# Altium PCB Current Sense.PcbDoc
Units mil, origin at the board's own origin, x right, y up, seen from the top; angles counter-clockwise.
Board outline 455 x 690 mil, 2 copper layers (Top Layer, Bottom Layer); 6 components, 4 nets, 20 pads, 2 vias.
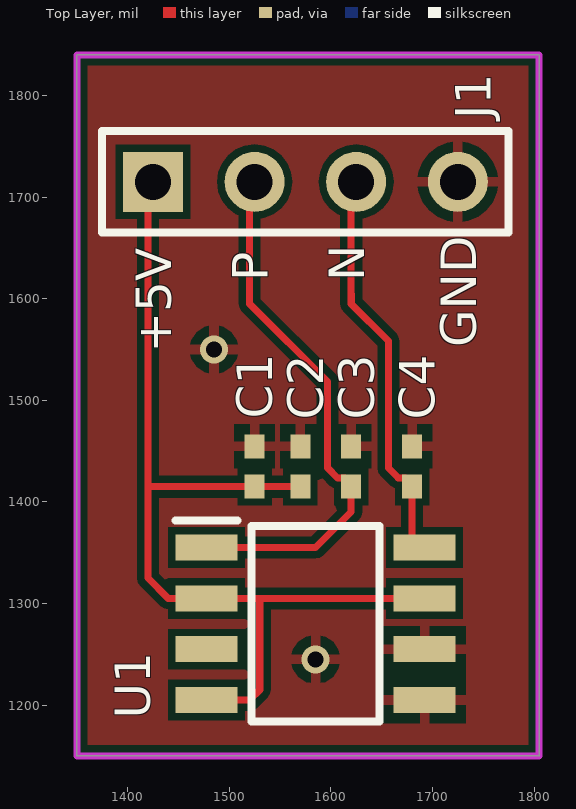
[diagram p0: Top Layer view]
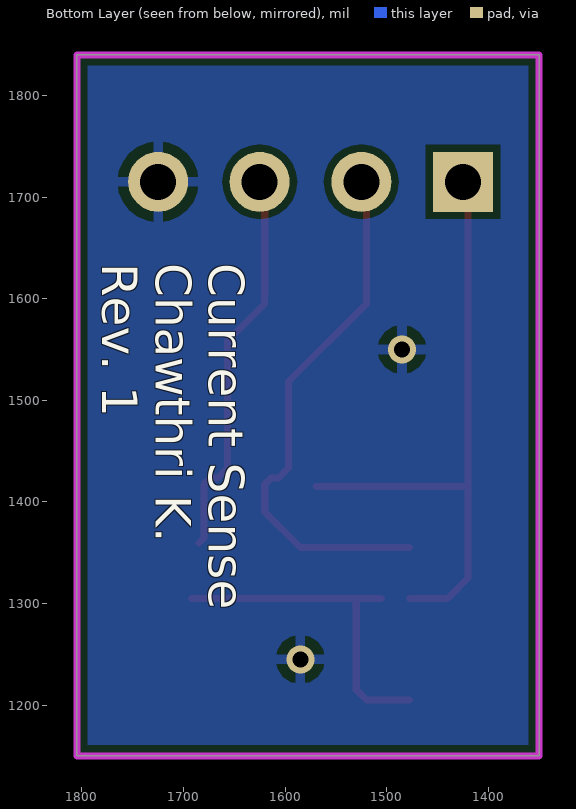
[diagram p1: Bottom Layer view, seen from below]

## Layer stack, top to bottom
Top Solder: solder mask 0.4, Solder Resist, Dk 3.5
Top Layer: signal copper 1.4
Dielectric 1: dielectric 12.6, FR-4, Dk 4.8
Bottom Layer: signal copper 1.4
Bottom Solder: solder mask 0.4, Solder Resist, Dk 3.5

## Board outline
1350,1150 1805,1150 1805,1840 1350,1840

## Design rules (kind name [scope] priority, off if disabled: settings)
Clearance [All] p1: gap=7 ignorepadtopadclearanceinfootprint=TRUE except(0: Arc-Hole Track-Hole SMDPad-Hole THPad-Hole Via-Hole Fill-Hole Poly-Hole Region-Hole Text-Hole)
DiffPairsRouting [All] p1: maxlimit=10 minlimit=7 mostfreqgap=7 toplayer_minwidth=7 toplayer_maxwidth=15 toplayer_prefwidth=7 bottomlayer_minwidth=7 bottomlayer_maxwidth=15 bottomlayer_prefwidth=7 maxuncoupledlength=500
MinimumSolderMaskSliver [All] p1: minsoldermaskwidth=7
PolygonConnect [All] p1: connectstyle=Relief reliefconductorwidth=10 reliefentries=4 polygonreliefangle="90 Angle" airgapwidth=10
RoutingVias [All] p1: holewidth=15.75 width=27.56 viastyle="Through Hole" minholewidth=15.75 minwidth=27.56 maxholewidth=28 maxwidth=50
SilkToSilkClearance [All] p1: silktosilkclearance=7
SilkToSolderMaskClearance [IsPad] p1: minsilkscreentomaskgap=7 clearancetoexposedcopper=TRUE
SolderMaskExpansion [All] p1: expansion=4 istentingtop=FALSE
Width [All] p1: maxlimit=15 minlimit=7 preferedwidth=7 minimp=50.000000 maximp=50.000000 favimp=50.000000
26 further rules are at their usual default settings.

## Classes and differential pairs
differential pair SENSE: +SENSE_P -SENSE_N

## Components (designator, comment, footprint, x,y, rotation, side; value= is the part's Value field where it differs from the comment)
C1 "Cap" 0402 1525,1435 r270 top value=100pF
C2 "Cap" 0402 1570,1435 r270 top value=100nF
C3 "Cap" 0402 1620,1435 r270 top value=1nF
C4 "Cap" 0402 1680,1435 r270 top value=1nF
J1 "Header 4H" HDR1X4 1425,1715 r0 top
U1 "MLX91205KDC-AAL-003-TU" SOIC127P602X173-8N 1585,1280 r0 top

## Footprints (in the part's own frame and the unit in brackets; to place one, negate y for a bottom-side part, rotate by r counter-clockwise, add the part's x,y. Pads: shape width x height; smd on the part's side, far side on the other; paste and mask are expansions set on the pad)
0402 [mm] "Chip Capacitor, Body 1.0x0.5mm, IPC High Density"
  rect 0.6x0.5 smd: 1(-0.5,0) 2(0.5,0)
  body extent -0.55,-0.3 0.55,0.3, height 1.3
HDR1X4 [mm] "Connector; Header; 4 Position"
  rect 1.5x1.5 hole 0.9: 1(0,0)
  round 1.5 hole 0.9: 2(2.54,0) 3(5.08,0) 4(7.62,0)
  silkscreen extent -1.27,-1.27 8.89,1.27
SOIC127P602X173-8N [mm]
  rect 1.55x0.65 smd: 1(-2.725,1.905) 2(-2.725,0.635) 3(-2.725,-0.635) 4(-2.725,-1.905) 5(2.725,-1.905) 6(2.725,-0.635) 7(2.725,0.635) 8(2.725,1.905)
  silkscreen extent -3.5,-2.44 1.6,2.58, body extent -3.01,-2.44 3.01,2.44, height 1.73

## Part data
C1 C2 C3 C4: "Capacitor", LatestRevisionDate=17-Jul-2002, LatestRevisionNote="Re-released for DXP Platform.", PackageDescription="Radial Cap, Thru-Hole; 2 Leads; 0.3 in Pin Spacing", PackageReference=RAD-0.3, Published=8-Jun-2000, Publisher="Altium Limited"
J1: "Header, 4-Pin, Right Angle", LatestRevisionDate=17-Jul-2002, LatestRevisionNote="Re-released for DXP Platform.", Publisher="Altium Limited"
U1: "Integrated Circuit", Manufacturer_Name=Melexis, Mouser Part Number=482-91205KDCAAL003TU, Arrow Part Number=MLX91205KDC-AAL-003-TU, Datasheet Link=http://www.mouser.com/datasheet/2/734/MLX91205-Datasheet-Melexis-953301.pdf, Height=1.73mm, Manufacturer_Part_Number=MLX91205KDC-AAL-003-TU, Mouser Price/Stock=https://www.mouser.com/Search/Refine.aspx?Keyword=482-91205KDCAAL003TU

## Via types
v1: diameter 27.56, hole 15.75, Top Layer to Bottom Layer, 2 vias

## Nets (pads, with @x,y where several pads share a name; then routed paths per layer and width w, separated by ;. In a path a pad name is that pad's centre, name@x,y a point inside that pad or via, vN(x,y) a via of type N, cw(c..) or ccw(c..) an arc to the next point about the centre after c; other vN are vias at no path point)
+5: C1.2 C2.2 J1.1 U1.2 U1.4 U1.7 | length 941.4
  Top Layer w7: J1.1 1420,1710 1420,1415 ; U1.4 1520,1205 1530,1215 1530,1305 ; U1.2 1440,1305 1420,1325 1420,1415 ; U1.2@1505,1305 1530,1305 ; C2.2@1569.64,1415 1420,1415 ; U1.7 1530,1305
GND: C1.1 C2.1 C3.1 C4.1 J1.4 U1.5 U1.6
  other v1: 1585,1245 1485,1550
SENSE_N: C4.2 J1.3 U1.8 | length 388.5
  Top Layer w7: J1.3 1620,1710 1620,1604.46 1620.13,1604.32 1620.13,1594.87 1656.66,1558.34 1656.66,1433.34 1665,1425 1666.37,1423.63 1673.66,1423.63 1680,1417.28 1680,1364.3 U1.8@1684.65,1359.65
SENSE_P: C3.2 J1.2 U1.1 | length 529.4
  Top Layer w7: U1.1 1585,1355 1620,1390 C3.2 1620,1417.28 1613.66,1423.63 1606.63,1423.63 1596.66,1433.6 1596.66,1518.34 1520,1595 1520,1710 J1.2
pads on no net: U1.3

## Polygon pours and split planes (outlines as drawn)
GND on Bottom Layer "GND_L02_P001" (solid, pour order 1): 1360,1830 1795,1830 1795,1160 1360,1160
GND on Top Layer "GND_L01_P000" (solid, pour order 0): 1360,1830 1795,1830 1795,1160 1360,1160

## Keep-outs
Keep-Out Layer:
  the board outline again, w7

## Silkscreen, mask and mechanical layers (free items; w line width, h text height)
Top Overlay:
  text "P" at 1538,1617 h35 r90
  text "N" at 1633,1617 h35 r90
  text "GND" at 1743,1552 h35 r90
  text "+5V" at 1443,1547 h35 r90
Bottom Overlay:
  text "Current Sense  / Chawthri K. / Rev. 1" at 1780,1635 h35 r90